# Altium PCB Mako DSP R2.0.PcbDoc (part 1 of 2)
Units mil, origin at the board's own origin, x right, y up, seen from the top; angles counter-clockwise.
Board outline 4440 x 2100 mil, 4 copper layers (Top Layer, GND, Power, Bottom Layer); 224 components, 235 nets, 988 pads, 314 vias.
Unrouted connection lines stored in the file: 159.
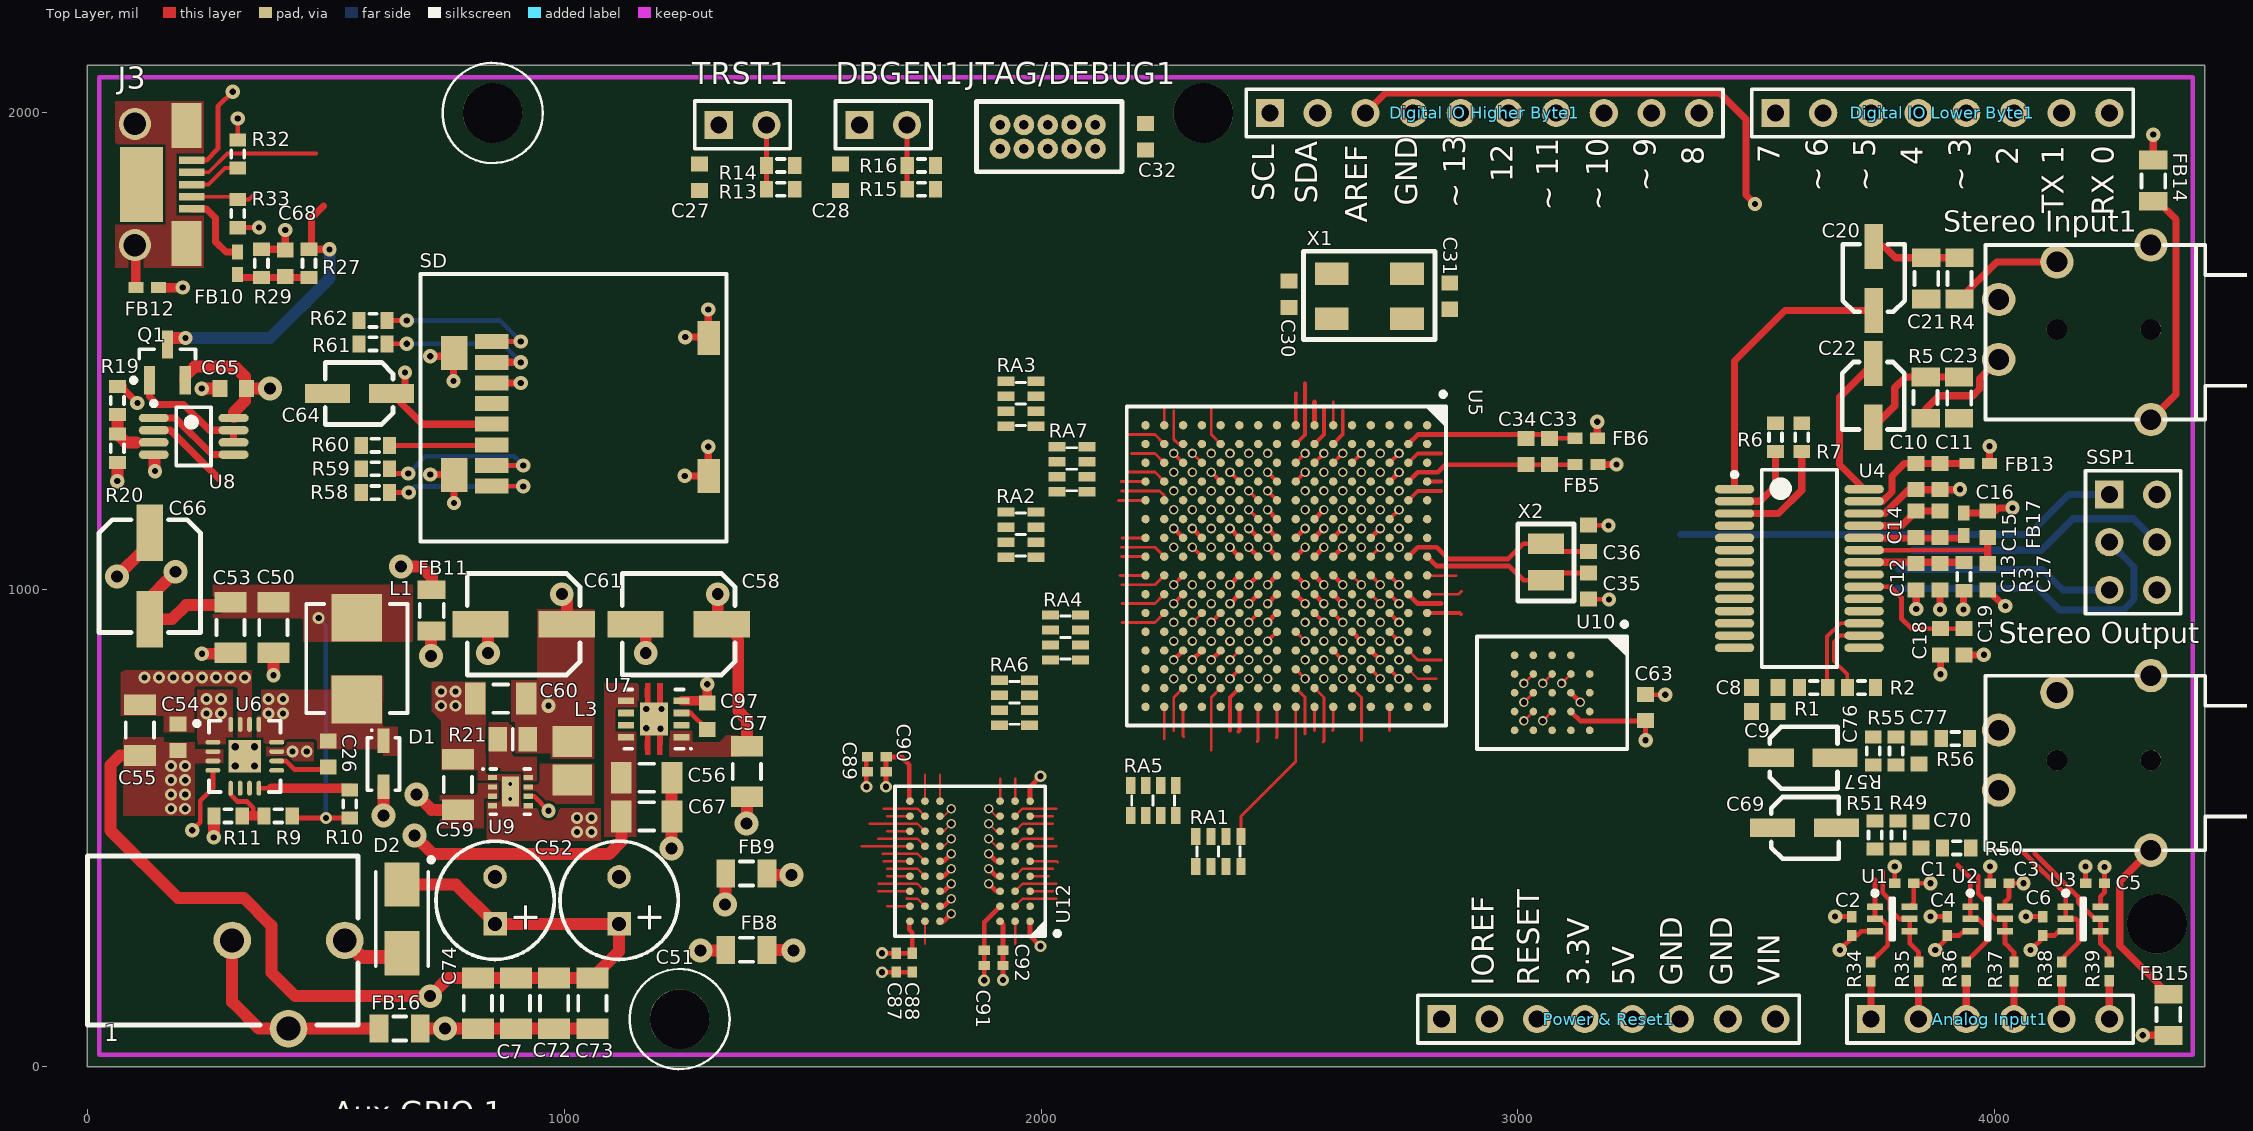
[diagram p0: Top Layer view]
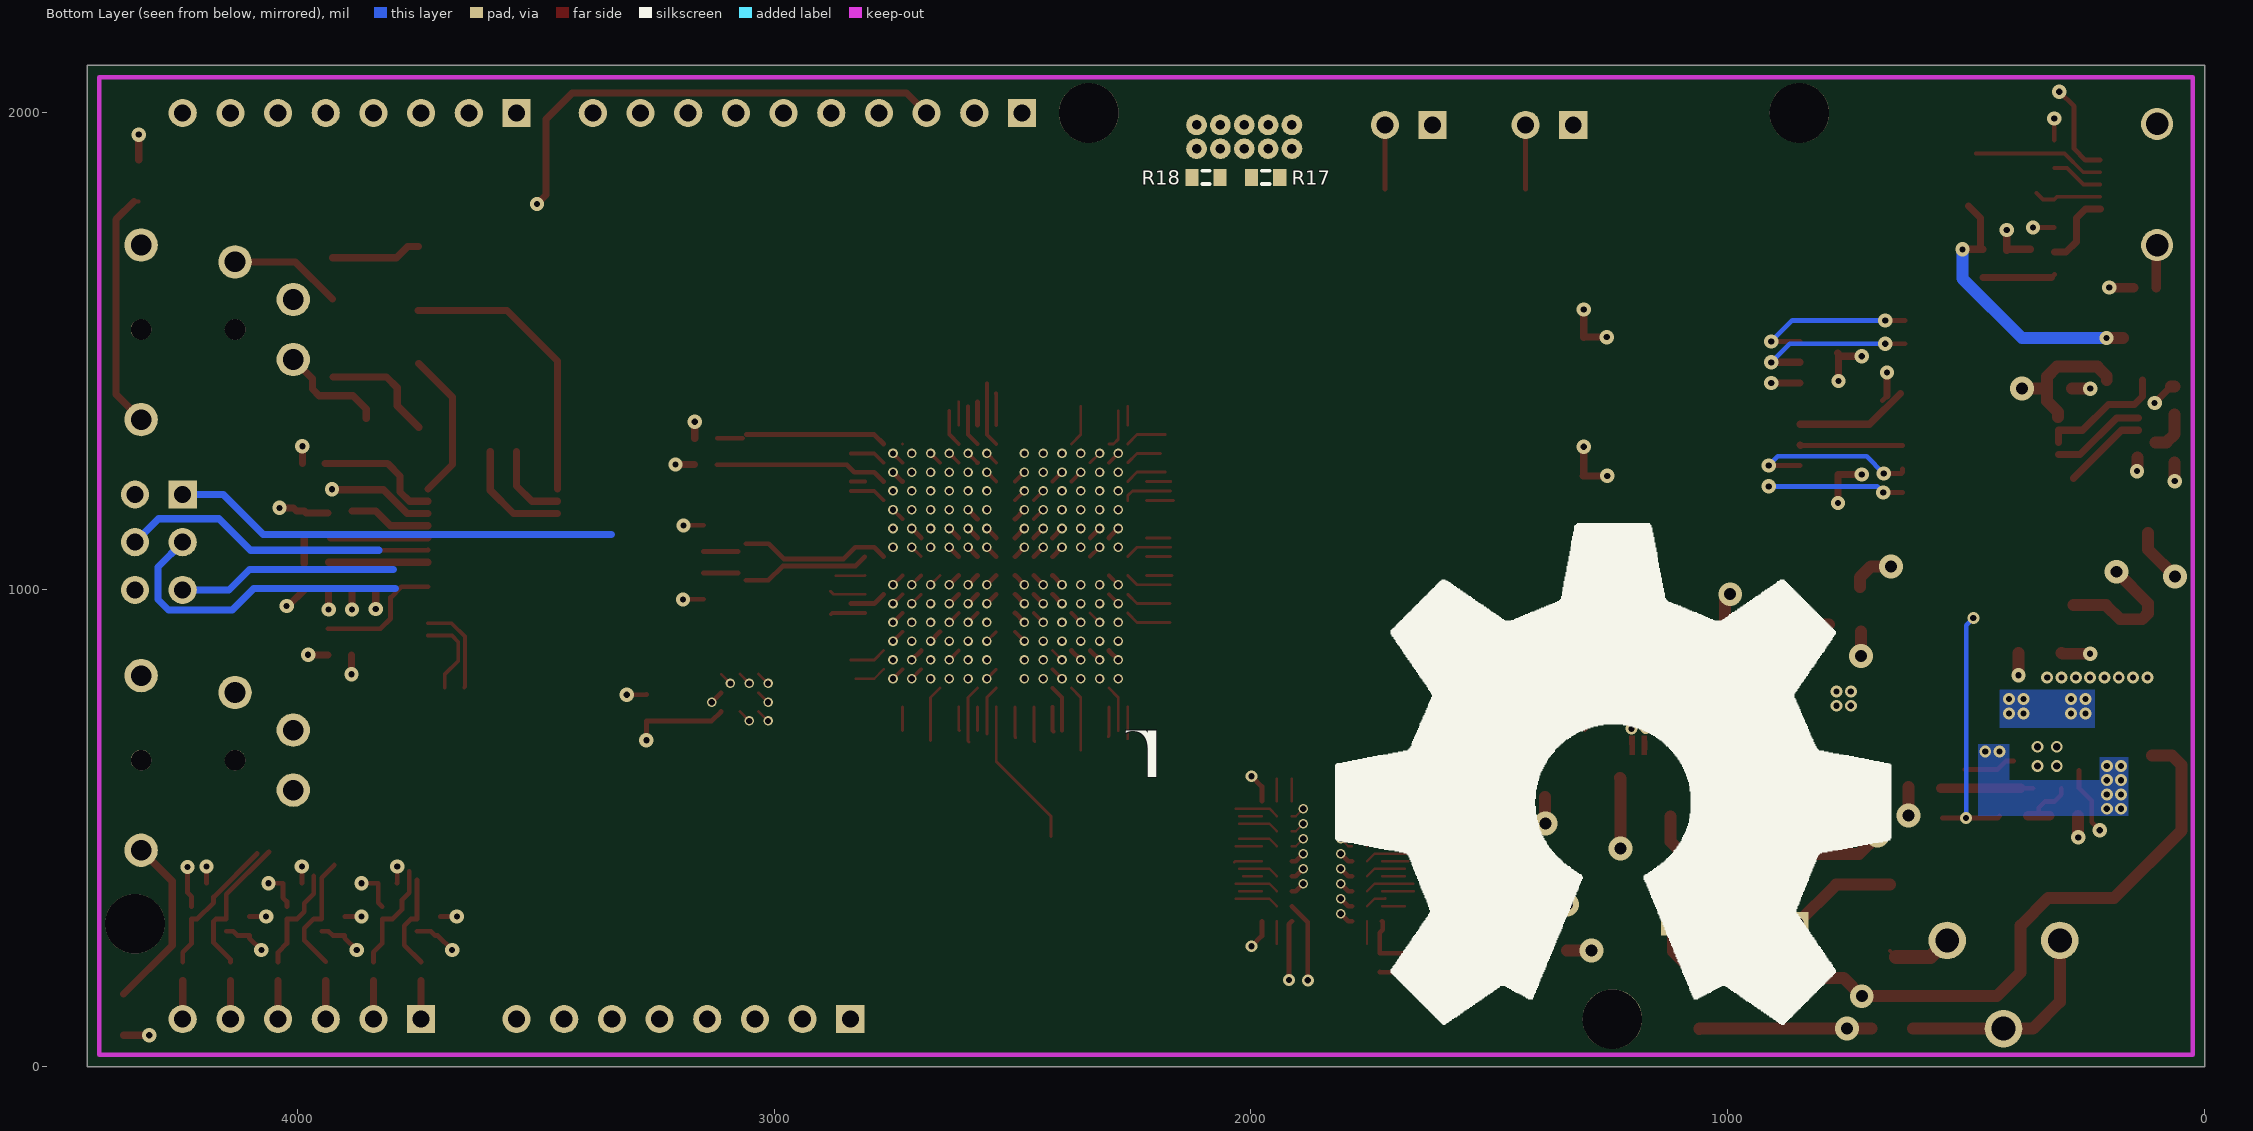
[diagram p1: Bottom Layer view, seen from below]
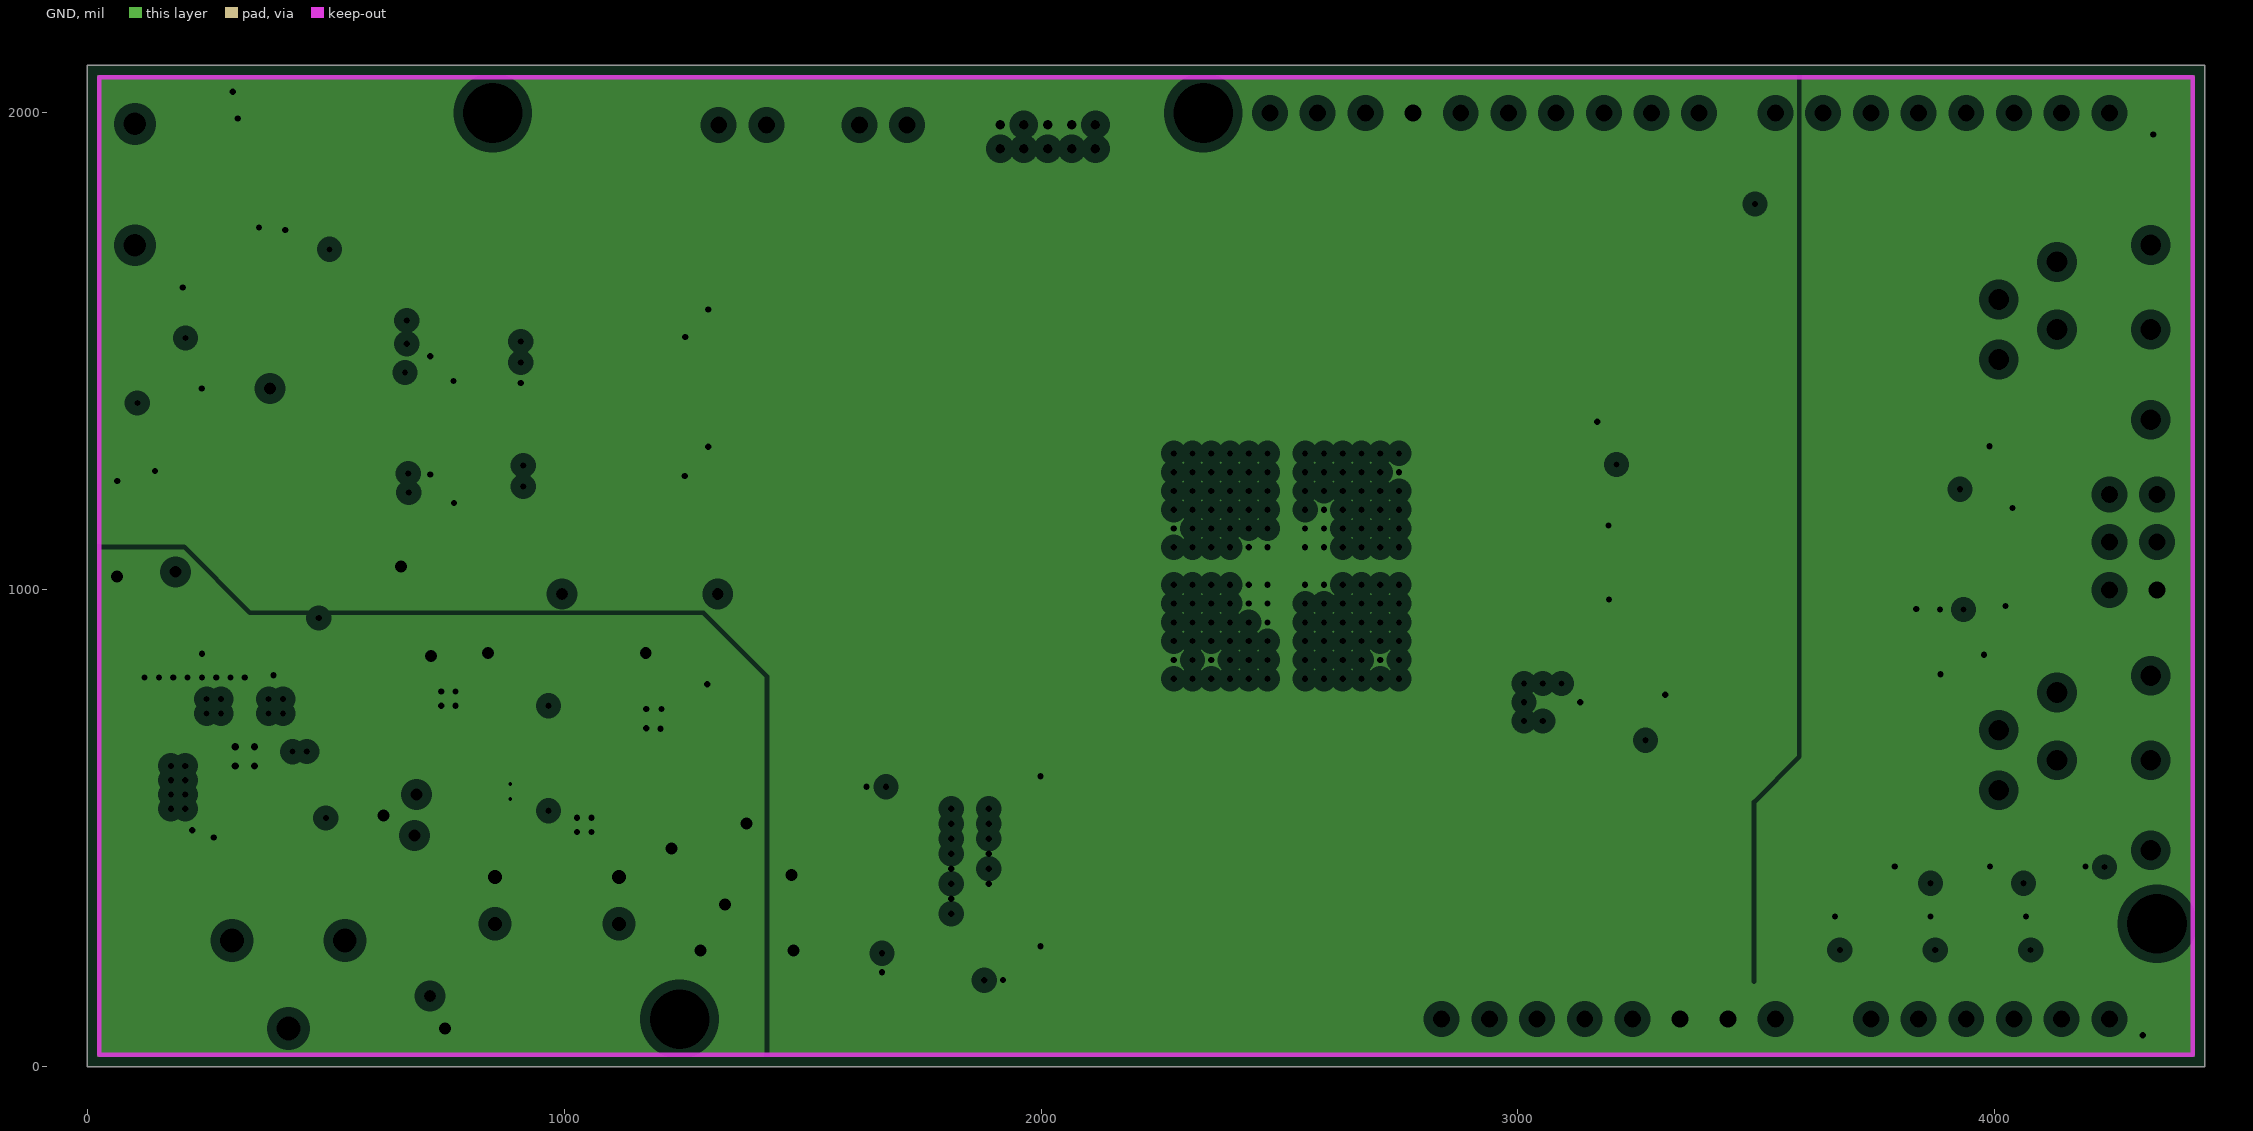
[diagram p2: GND, clearances drawn from the general rule]
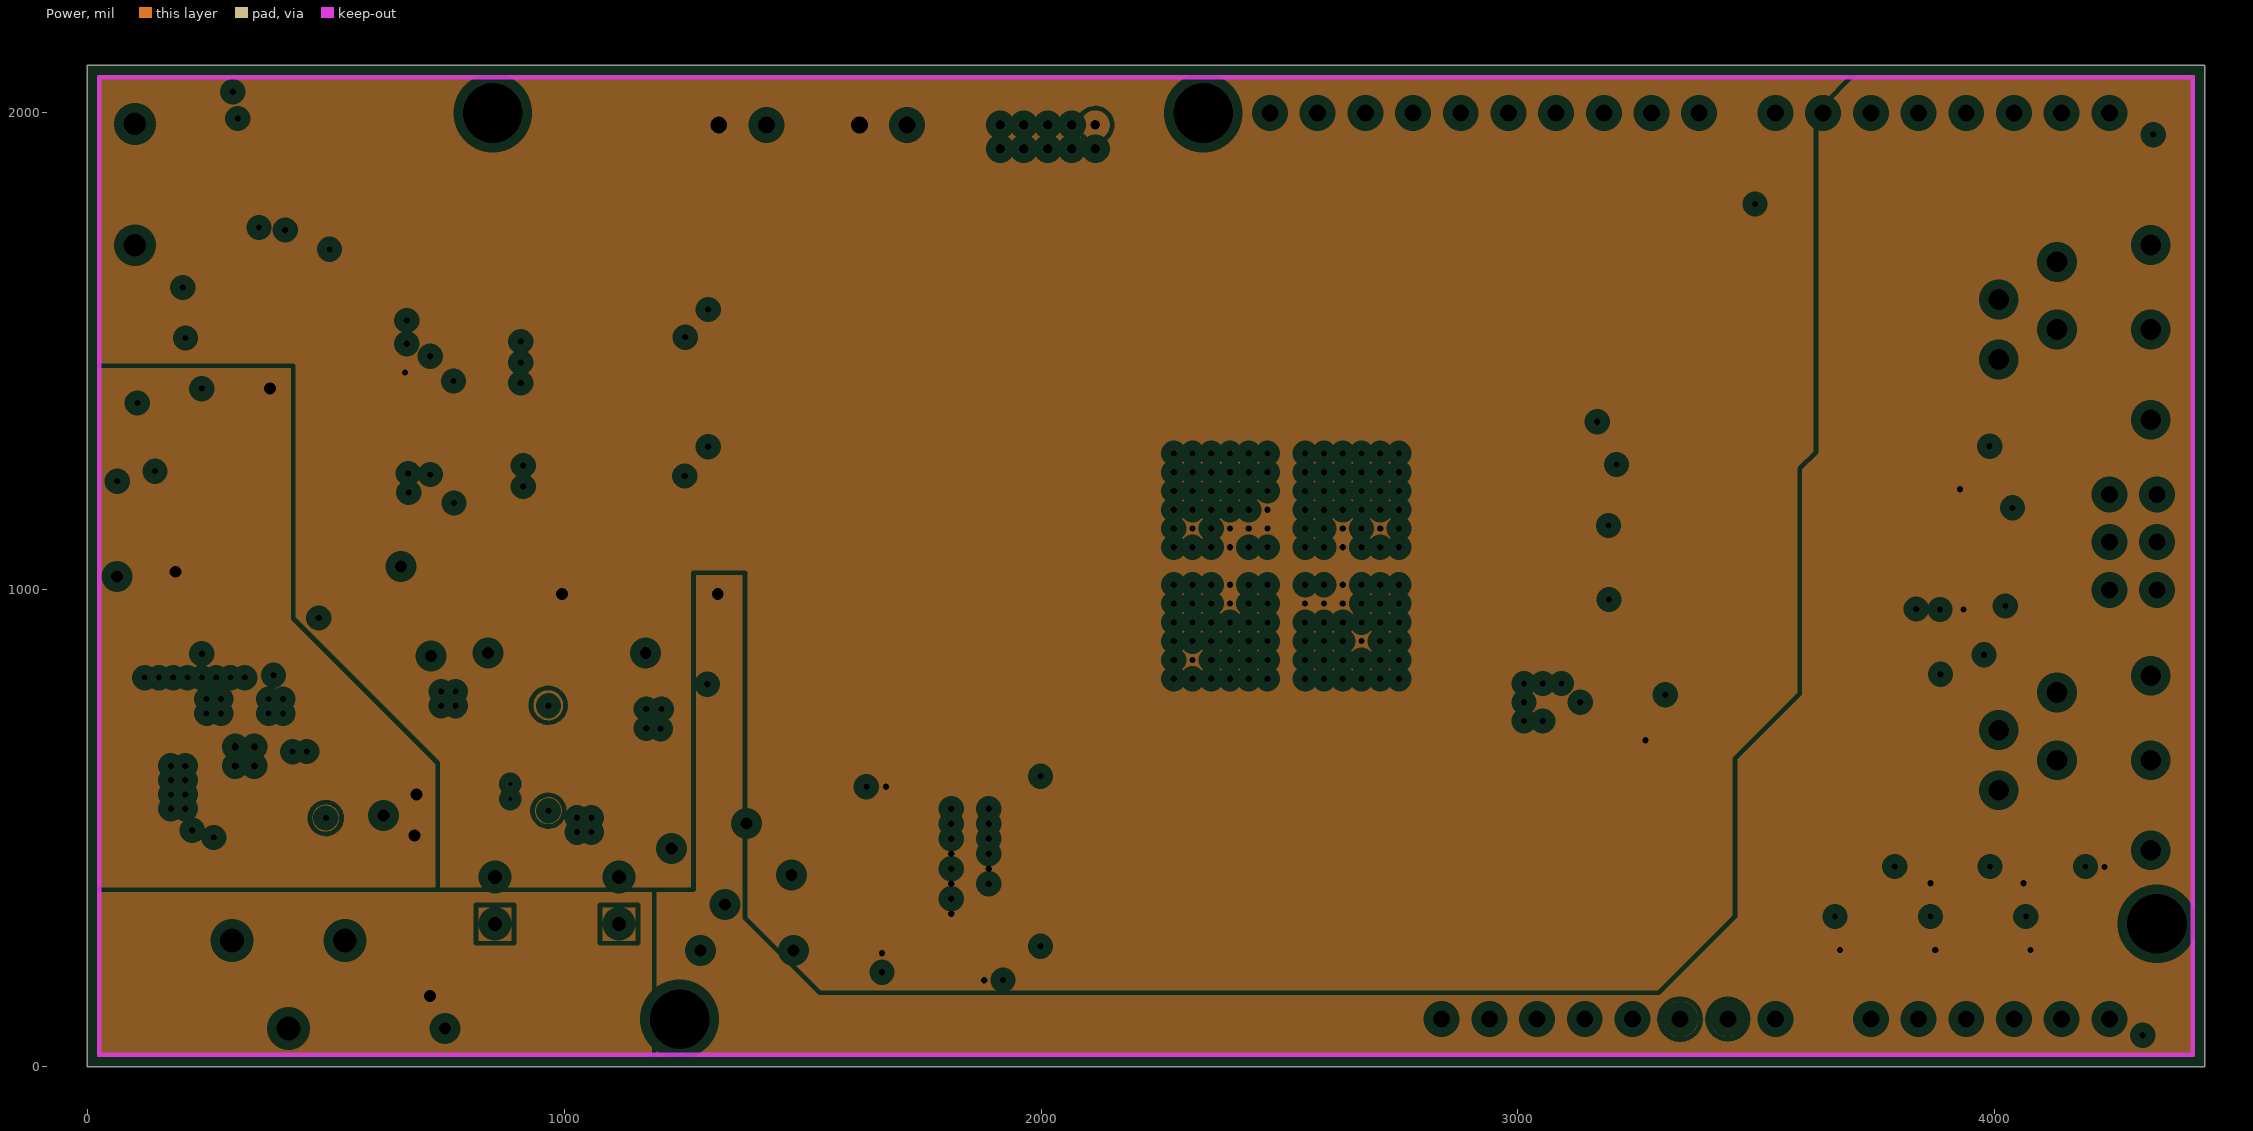
[diagram p3: Power, clearances drawn from the general rule]

## Layer stack, top to bottom
Top Layer: signal copper 1.4
Dielectric: core 12.6, FR-4, Dk 4.8
GND: plane copper 1.4, net GND
Dielectric: prepreg 12.6, FR-4, Dk 4.8
Power: plane copper 1.4, net (Multiple Nets)
Dielectric: core 12.6, FR-4, Dk 4.8
Bottom Layer: signal copper 1.4

## Board outline
0,0 4440,0 4440,2100 0,2100

## Design rules (kind name [scope] priority, off if disabled: settings)
Clearance [All] p1: gap=5
ComponentClearance [All] p1: gap=0 collisioncheckmode=3 verticalgap=10 showdistances=FALSE
DiffPairsRouting [All] p1: maxlimit=10 minlimit=10 mostfreqgap=10 maxuncoupledlength=500
FanoutControl Fanout_BGA [IsBGA] p1: bgadir=Out bgaviamode=Closest fanoutstyle=BGA fanoutdirection=Alternating viagrid=1 // Fanout_BGA (Default Rule)
FanoutControl Fanout_SOIC [(InComponent('U8') AND InComponent('U7'))] p3: bgadir=Out bgaviamode=Centered fanoutstyle=Staggered fanoutdirection=Alternating viagrid=1 // Fanout_SOIC (Default Rule)
FanoutControl Fanout_Small [All] p4: bgadir=Out bgaviamode=Centered fanoutstyle=Auto fanoutdirection=Alternating viagrid=1 // Fanout_Small (Default Rule)
HoleSize [All] p1: absolutevalues=TRUE maxlimit=120 minlimit=1 maxpercent=80.000 minpercent=20.000
MatchedLengths "SDRAM Signals" [InNetClass('U12-signals')] p1: tolerance=1 checknetsindiffpair=TRUE checkdiffpairvsdiffpair=TRUE checkothers=TRUE
MatchedLengths "SPIFI Flash Module" [(InNet('SPIFI_CS')AND InNet('SPIFI_SCK')AND InNet('SPIFI_MOSI')AND InNet('SPIFI_MISO')AND InNet('SPIFI_SIO2')AND InNet('SPIFI_SIO3'))] p2: tolerance=1 checknetsindiffpair=TRUE checkdiffpairvsdiffpair=TRUE checkothers=TRUE // 104MHZ Maximum signal speed
MinimumSolderMaskSliver [All] p1 off: minsoldermaskwidth=10
PlaneClearance [All] p1: clearance=20
PlaneConnect [All] p1: planeconnectstyle=Direct reliefexpansion=20 reliefentries=4 reliefconductorwidth=10 reliefairgap=10
PolygonConnect [All] p1: connectstyle=Direct reliefconductorwidth=45 reliefentries=4 polygonreliefangle="90 Angle" airgapwidth=10
RoutingVias [All] p1: holewidth=13 width=20 viastyle="Through Hole" minholewidth=13 minwidth=20 maxholewidth=28 maxwidth=50
SilkToSilkClearance [All] p1 off: silktosilkclearance=10
SilkToSolderMaskClearance SilkscreenOverComponentPads [IsPad] p1 off: minsilkscreentomaskgap=10 clearancetoexposedcopper=TRUE
SolderMaskExpansion [All] p1: expansion=4
Width "Power & Ground" [(InNet('DVDD') OR InNet('AVDD')OR InNet('+5V'))] p1: maxlimit=25 minlimit=10 preferedwidth=10 minimp=50.000000 maximp=50.000000 favimp=50.000000
Width "All Others" [All] p2: maxlimit=35 minlimit=5 preferedwidth=6 minimp=50.000000 maximp=50.000000 favimp=50.000000
17 further rules are at their usual default settings.

## Classes and differential pairs
component class "Mako DSP Power R2.0": 1 12VDC/VCCIN C7 C26 C50 C51 C52 C53 C54 C55 C56 C57 C58 C59 C60 C61 C65 C66 C67 C72 C73 C74 C97 D1 D2 D? FB8 FB9 FB11 FB16 L1 L3 Q1 R9 R10 R11 R19 R20 R21 U6 U7 U8 U9
component class "Mako DSP Arduio IO R2.0": "Analog Input1" "Analog Input?" "Aux GPIO 0" "Aux GPIO 1" C1 C2 C3 C4 C5 C6 "Digital IO Higher Byte1" "Digital IO Higher Byte?" "Digital IO Lower Byte1" "Digital IO Lower Byte?" "Power & Reset1" "Power & Reset?" R34 R35 R36 R37 R38 R39 SSP? U1 U2 U3
component class "Mako DSP Audio Codec R2.0": C8 C9 C10 C11 C12 C13 C14 C15 C16 C17 C18 C19 C20 C21 C22 C23 C69 C70 C75 C76 C77 C78 C79 FB13 FB14 FB15 FB17 R1 R2 R3 R4 R5 R6 R7 R31 R46 R48 R49 R50 R51 R52 R53 R54 R55 R56 R57 "Stereo Input1" "Stereo Input?" "Stereo Output" "Stereo Output1" "Stereo Output?" U4 U11
component class "Mako DSP Main R2.0": C24 C25 C27 C28 C29 C30 C31 C32 C33 C34 C35 C36 C37 C38 C39 C40 C41 C42 C43 C44 C45 C46 C47 C48 C49 C62 C80 C81 C82 C83 DBGEN1 FB1 FB2 FB3 FB4 FB5 FB6 "ISP PGM" JTAG/DEBUG1 R8 R12 R13 R14 R15 R16 R17 R18 R23 R24 R25 R26 R28 R30 RESET RESET1 RTCALARM1 SSP1 STATUS TRST1 U5 "USER STATUS" WAKEUP0 WAKEUP1 WAKEUP2 WAKEUP3 X1 X2
component class "Mako DSP USB R2.1": C68 FB10 FB12 J3 R27 R29 R32 R33
component class "Mako DSP Memory R2.0": C71 C84 C85 C86 C87 C88 C89 C90 C91 C92 C93 C94 C95 C96 RA1 RA2 RA3 RA4 RA5 RA6 RA7 U12
component class "Mako DSP QuadFlash and Boot R2.1": C63 R22 R40 R41 R42 R43 R44 R45 R47 U10
component class "Mako DSP SD Card and MIDI R2.1": C64 R58 R59 R60 R61 R62 SD
differential pair USB0: +USB0_P -USB0_N

## Components (designator, comment, footprint, x,y, rotation, side; value= is the part's Value field where it differs from the comment)
1 "Center-positive 2.1 mm power jack" PJ-102AH 540,265 r90 top
"Analog Input1" "Arduino Leonardo Analog" "Arduino Leonardo Analog" 3740,100 r0 top locked
"Aux GPIO 0" "Header 5X2" HDR2X5 558,-661 r0 top
"Aux GPIO 1" "Header 5X2" HDR2X5 566,-294 r0 top
C1 "Cap Semi" 0402 3810,385 r0 top
C2 "Cap Semi" 0402 3700,295 r270 top
C3 "Cap Semi" 0402 4010,385 r0 top
C4 "Cap Semi" 0402 3900,295 r270 top
C5 "Cap Semi" 0402 4210,385 r0 top
C6 "Cap Semi" 0402 4100,295 r270 top
C7 "Cap Semi" C1206 899,133 r90 top
C8 "Cap Semi" 1608[0603] 3517.56,795.31 r180 top
C9 "Cap Semi" 1608[0603] 3517.56,745.31 r180 top
C10 "Cap Semi" 1608[0603] 3835,1237.56 r270 top
C11 "Cap Semi" 1608[0603] 3885,1237.56 r270 top
C12 "Cap Semi" 1608[0603] 3835,1027.56 r90 top
C13 "Cap Semi" 1608[0603] 3885,1027.56 r90 top
C14 "Cap Semi" 1608[0603] 3835,1137.56 r90 top
C15 "Cap Semi" 1608[0603] 3885,1137.56 r90 top
C16 "Cap Semi" 1608[0603] 3985,1137.56 r270 top
C17 "Cap Semi" 1608[0603] 3985,1027.56 r90 top
C18 "Cap Semi" 1608[0603] 3886,891 r90 top
C19 "Cap Semi" 1608[0603] 3935,891 r90 top
C20 "Cap Semi" "Panasonic VS B"#1 3746,1653 r270 top
C21 "Cap Semi" "SM 0805 - gap trimmed" 3856,1653 r90 top
C22 "Cap Semi" "Panasonic VS B"#1 3745,1408 r90 top
C23 "Cap Semi" "SM 0805 - gap trimmed" 3925,1403 r90 top
C24 "Cap Semi" 0402 2492,3739 r270 top
C25 "Cap Semi" 0402 2397,3739 r270 top
C26 "Cap Semi" 1608[0603] 505.25,656 r270 top
C27 "Cap Semi" CAPC1608L 1284,1865 r90 top
C28 "Cap Semi" CAPC1608L 1579,1865 r90 top
C29 "Cap Semi" CAPC1608L 3491,2700 r180 top
C30 "Cap Semi" 1608[0603] 2520,1620 r90 top
C31 "Cap Semi" 1608[0603] 2857,1616 r90 top
C32 "Cap Semi" CAPC1608L 2219,1950 r270 top
C33 "Cap Semi" 1608[0603] 3065.7,1290 r270 top
C34 "Cap Semi" 1608[0603] 3016.7,1290 r270 top
C35 "Cap Semi" 1608[0603] 3147.7,1008 r90 top
C36 "Cap Semi" 1608[0603] 3147.7,1108 r270 top
C37 "0402" 0402 3446,3015 r180 top
C38 "0402" 0402 2378,2691 r90 top
C39 "0402" 0402 2955,2685 r90 top
C40 "0402" 0402 2600,2695 r90 top
C41 "0402" 0402 2380,2885 r90 top
C42 "0402" 0402 2334,2226 r0 top
C43 "0402" 0402 2533,2244 r0 top
C44 "0402" 0402 2199,2426 r0 top
C45 "0402" 0402 3221,3825 r180 top
C46 "0402" 0402 2365,2442 r0 top
C47 "0402" 0402 3426,3585 r180 top
C48 "0402" 0402 3451,3390 r180 top
C49 "0402" 0402 3451,3335 r180 top
C50 "1206" C1206 390.25,921 r90 top
C51 "Cap Pol1" CAPPR2.5-6.3x5 1115,349 r90 top
C52 "Cap Pol1" CAPPR2.5-6.3x5 855,349 r90 top
C53 "Cap Semi" C1206 300.25,921 r270 top
C54 "0603" 1608[0603] 190.25,691 r270 top
C55 "1206" C1206 110.25,706 r270 top
C56 "1206 Tantulum" C1206 1173,606 r0 top
C57 "1206 Tantulum" C1206 1383,619 r270 top
C58 "VS C" "Panasonic VS C" 1240,928 r0 top
C59 "Cap Semi" C1206 777,592 r270 top
C60 "Cap Semi" C1206 867,772 r0 top
C61 "VS C" "Panasonic VS C" 915,928 r0 top
C62 "0603" 1608[0603] 4996,1414 r90 top
C63 "0603" 1608[0603] 3267.62,753.21 r270 top
C64 "VS B" "Panasonic VS B"#2 501,1347 r0 top
C65 "Cap Semi" 1608[0603] 306,1422 r180 top
C66 "VS C" "Panasonic VS C" 131,1029 r90 top
C67 "1206 Tantulum" C1206 1173,525 r180 top
C68 "Cap Semi" 1608[0603] 415,1684.74 r270 top
C69 "Cap Semi" "Panasonic VS B"#1 3601,501 r180 top
C70 "0603" 1608[0603] 3845,486 r270 top
C71 "0402" 0402 1941,-146 r270 top
C72 "Cap Semi" C1206 979,133 r90 top
C73 "Cap Semi" C1206 1059,133 r90 top
C74 "Cap Semi" C1206 819,133 r90 top
C75 "0603" 1608[0603] 5127.9,374.47 r90 bottom
C76 "Cap Semi" "Panasonic VS B"#1 3598,648 r180 top
C77 "0603" 1608[0603] 3841,662 r90 top
C78 "0603" 1608[0603] 4890.9,374.47 r90 bottom
C79 "0603" 1608[0603] 5064,1003 r0 top
C80 "0402" 0402 2890,3332 r90 top
C81 "0402" 0402 3026,3274 r90 top
C82 "0402" 0402 3154,3157 r90 top
C83 "0402" 0402 2756,3041 r90 top
C84 "0402" 0402 1906,-146 r270 top
C85 "0402" 0402 1744,-178 r270 top
C86 "0402" 0402 1710,-178 r270 top
C87 "0402" 0402 1696.63,218.25 r90 top
C88 "0402" 0402 1729.63,218.25 r90 top
C89 "0402" 0402 1655.63,618.25 r0 top
C90 "0402" 0402 1655.63,650.25 r0 top
C91 "0402" 0402 1900.63,212.25 r180 top
C92 "0402" 0402 1900.63,244.25 r180 top
C93 "0402" 0402 2091,-158 r270 top
C94 "0402" 0402 2052,-158 r270 top
C95 "0402" 0402 1593.65,-121.88 r270 top
C96 "0402" 0402 1553.65,-123.88 r270 top
C97 "0603" 1608[0603] 1300,735 r270 top
D1 "PMEG1030EH_EJ" PMEG1030EH_EJ 621,635 r90 top
D2 "PMEG4050EP" PMEG4050EP 660,310 r270 top
DBGEN1 "Header 2" HDR1X2 1619,1975 r0 top
"Digital IO Higher Byte1" "Arduino Leonardo High Byte" "Arduino Leonardo High Byte" 2480,2000 r0 top locked
"Digital IO Lower Byte1" "Arduino Leonardo Low Byte" "Arduino Leonardo Low Byte" 3540,2000 r0 top locked
FB1 "BLM15HG601SN1D" BLM18PG121SN1D 2352,3729 r270 top
FB2 "BLM15HG601SN1D" BLM18PG121SN1D 2447,3729 r270 top
FB3 "BLM15HG601SN1D" BLM18PG121SN1D 2242,3729 r90 top
FB4 "BLM15HG601SN1D" BLM18PG121SN1D 2297,3729 r90 top
FB5 "BLM15HG601SN1D" BLM18PG121SN1D 3143.7,1263 r180 top
FB6 "BLM15HG601SN1D" BLM18PG121SN1D 3142.7,1318 r180 top
FB8 "MI0805L301R-10" "SM 0805 - gap trimmed" 1382,245 r180 top
FB9 "MI0805L301R-10" "SM 0805 - gap trimmed" 1382,405 r180 top
FB10 "BLM15HG601SN1D" BLM18PG121SN1D 315,1684.74 r90 top
FB11 "MI0805L301R-10" "SM 0805 - gap trimmed" 722,957 r90 top
FB12 "BLM15HG601SN1D" BLM18PG121SN1D 125.58,1634.02 r0 top
FB13 "BLM15HG601SN1D" BLM18PG121SN1D 3965.16,1265.16 r0 top
FB14 "Ferrite" "SM 0805 - gap trimmed" 4332,1858 r90 top
FB15 "Ferrite" "SM 0805 - gap trimmed" 4364,109 r270 top
FB16 "MI0805L301R-10" "SM 0805 - gap trimmed" 655,80 r180 top
FB17 "BLM15HG601SN1D" BLM18PG121SN1D 3935,1137.56 r90 top
J3 "DX4R005J91R5100" "Micro USB Circular Holes Only" 60.57,1849.02 r270 top
JTAG/DEBUG1 "S9015E-05-ND" S9015E-05-ND 1914,1975 r0 top
L1 "Inductor" CIP0530LR3R3 565.25,856 r90 top
L3 "Inductor" VLS252012T-2R2M1R3 1017,642 r90 top
"Power & Reset1" "Arduino Leonardo Power" "Arduino Leonardo Power" 2840,100 r0 top locked
Q1 "FDN340P" SOT23-3N 168,1477 r90 top
R1 "Res3" J1-0603 3620.16,795.16 r180 top
R2 "Res3" J1-0603 3720.16,795.16 r0 top
R3 "Res3" J1-0603 3935,1027.56 r270 top
R4 "Res3" "SM 0805 - gap trimmed" 3926,1653 r270 top
R5 "Res3" "SM 0805 - gap trimmed" 3855,1403 r270 top
R6 "Res3" J1-0603 3540,1320 r270 top
R7 "Res3" J1-0603 3595,1320 r270 top
R8 "Res3" J1-0603 2187,3729 r270 top
R9 "Res3" J1-0603 400.25,526 r0 top
R10 "Res3" J1-0603 550.25,551 r90 top
R11 "Res3" J1-0603 295.25,526 r0 top
R12 "Res3" J1-0603 3491,2650 r0 top
R13 "Res3" J1-0603 1454,1840 r180 top
R14 "Res3" J1-0603 1454,1890 r180 top
R15 "Res3" J1-0603 1749,1840 r180 top
R16 "Res3" J1-0603 1749,1890 r180 top
R17 "Res3" J1-0603 1969,1865 r180 bottom
R18 "Res3" J1-0603 2094,1865 r0 bottom
R19 "Res3" J1-0603 63,1397 r90 top
R20 "Res3" J1-0603 63,1297 r90 top
R21 "Res3" RESC2012L 892,687 r0 top
R22 "0603" J1-0603 9566,1666 r90 top
R23 "Res3" J1-0603 1380,3790 r90 top
R24 "Res3" J1-0603 1310,3790 r270 top
R25 "Res3" J1-0603 1450,3870 r90 top
R26 "Res3" J1-0603 6043,1024 r0 top
R27 "Res3" J1-0603 465,1684.74 r90 top
R28 "Res3" J1-0603 5948,1039 r270 top
R29 "Res3" J1-0603 365,1684.74 r90 top
R30 "Res3" J1-0603 6143,1069 r90 top
R31 "0603" J1-0603 5175.9,473.47 r90 bottom
R32 "Res3" J1-0603 315.58,1914.02 r90 top
R33 "Res3" J1-0603 315.58,1789.02 r270 top
R34 "Res3" "0402 - duplicate" 3740,200 r90 top
R35 "Res3" "0402 - duplicate" 3840,200 r90 top
R36 "Res3" "0402 - duplicate" 3940,200 r90 top
R37 "Res3" "0402 - duplicate" 4040,200 r90 top
R38 "Res3" "0402 - duplicate" 4140,200 r90 top
R39 "Res3" "0402 - duplicate" 4240,200 r90 top
R40 "0603" J1-0603 9336,1666 r90 top
R41 "0603" J1-0603 9125,1666 r90 top
R42 "0603" J1-0603 8895,1666 r90 top
R43 "0603" J1-0603 7975,1666 r90 top
R44 "0603" J1-0603 8205,1666 r90 top
R45 "0603" J1-0603 8435,1666 r90 top
R46 "0603" J1-0603 5127.9,473.47 r90 bottom
R47 "0603" J1-0603 8665,1666 r90 top
R48 "0603" J1-0603 5127.9,572.47 r90 bottom
R49 "0603" J1-0603 3797,486 r90 top
R50 "0603" J1-0603 3920,459 r180 top
R51 "0603" J1-0603 3749,486 r90 top
R52 "0603" J1-0603 4842.9,472.47 r90 bottom
R53 "0603" J1-0603 4890.9,473.47 r90 bottom
R54 "0603" J1-0603 4890.9,572.47 r90 bottom
R55 "0603" J1-0603 3793,662 r270 top
R56 "0603" J1-0603 3917,688 r180 top
R57 "0603" J1-0603 3745,662 r270 top
R58 "0603" J1-0603 604,1204 r180 top
R59 "0603" J1-0603 604,1254 r180 top
R60 "0603" J1-0603 604,1303 r180 top
R61 "0603" J1-0603 599,1516 r180 top
R62 "0603" J1-0603 599,1565 r180 top
RA1 "RESISTOR ARRAY" 742C083 2371.95,451.28 r180 top
RA2 "RESISTOR ARRAY" 742C083 1957.59,1115.96 r270 top
RA3 "RESISTOR ARRAY" 742C083 1957.59,1389.96 r90 top
RA4 "RESISTOR ARRAY" 742C083 2051.15,900.11 r270 top
RA5 "RESISTOR ARRAY" 742C083 2234.95,558.28 r180 top
RA6 "RESISTOR ARRAY" 742C083 1944.15,763.11 r270 top
RA7 "RESISTOR ARRAY" 742C083 2064.59,1252.96 r270 top
RESET1 "Tactile Switch" TL3301 4098,5059 r90 top
RTCALARM1 "Socket" PIN1 1852,2590 r90 top
SD "JAE SJ107021" "JAE SJ107021" 1303,1369 r0 top
SSP1 "Header 3X2" HDR2X3 4240,1200 r270 top locked
STATUS "APTF1616SEEZGQBDC" "RGB LED APTF1616SEEZGQBDC" 1380,3905 r180 top
"Stereo Input1" "CUI 43515TS" "CUI SJ-43515TS" 4327,1546 r180 top locked
"Stereo Output" "CUI 43515TS" "CUI SJ-43515TS" 4327,643 r180 top locked (schematic designator "Stereo Output1")
TRST1 "Header 2" HDR1X2 1324,1975 r0 top
U1 "BAV70S SOT-363" BAV70S_SOT363 3785,310 r0 top
U2 "BAV70S SOT-363" BAV70S_SOT363 3985,310 r0 top
U3 "BAV70S SOT-363" BAV70S_SOT363 4185,310 r0 top
U4 "WM8778" WM8778 3590,1045 r0 top
U5 "LPC4330FET256" SOT740-2 2514.28,1050 r270 top locked
U6 "MIC24085" MIC24085-AYML 330.25,651 r0 top
U7 "TPS73733QDRBRQ1" TI-DRB8-1750X1500TP_V 1188,729 r180 top
U8 "Ti LM358 SOP" LM358 223,1322 r0 top
U9 "TPS62162SOP" DSG8-1600X900TP 887,577 r0 top
U10 "S25FL064P0XNFI001" S25FL064P0XNFI001 3071.62,784.21 r270 top
U11 "OPA2320AIDRGR" TI-DRG8-2000X1200TP_V 5008.9,434.47 r180 bottom
U12 "AS4C8M16S" AS4C8M16S 1851,431 r180 top
"USER STATUS" "APTF1616SEEZGQBDC" "RGB LED APTF1616SEEZGQBDC" 6073,1109 r180 top
WAKEUP0 "Socket" PIN1 1474,2579 r270 top
WAKEUP1 "Socket" PIN1 6015,609 r90 top
WAKEUP2 "Socket" PIN1 6762,598 r90 top
WAKEUP3 "Socket" PIN1 6464,565 r90 top
X1 "ABM3B-12.000MHZ-B2-T" ABM3B-12.000MHZ-B2-T 2767,1663 r180 top
X2 "ABS07-32.768KHZ-T" ABS07-32.768KHZ-T 3058.7,1020 r90 top

## Footprints (in the part's own frame and the unit in brackets; to place one, negate y for a bottom-side part, rotate by r counter-clockwise, add the part's x,y. Pads: shape width x height; smd on the part's side, far side on the other; paste and mask are expansions set on the pad)
0402 [mm] "Chip Capacitor, Body 1.0x0.5mm, IPC High Density"
  rect 0.6x0.5 smd: 1(-0.5,0) 2(0.5,0)
  body extent -0.55,-0.3 0.55,0.3, height 1.3
"0402 - duplicate" [mm] "Chip Capacitor, Body 1.0x0.5mm, IPC High Density"
  rect 0.6x0.5 smd: 1(-0.5,0) 2(0.5,0)
  body extent -0.55,-0.3 0.55,0.3, height 1.3
742C083 [mm] "Resistor array"
  rect 0.5x0.9 smd mask+0.025: 1(-1.2,-0.8) 2(-0.4,-0.8) 3(0.4,-0.8) 4(1.2,-0.8) 5(1.2,0.8) 6(0.4,0.8) 7(-0.4,0.8) 8(-1.2,0.8)
  silkscreen extent -1.14,-0.25 1.14,0.25, body extent -1.27,-0.76 1.27,0.76, height 0.9
1608[0603] [mm] "Chip Capacitor, Body 1.6x0.8mm, IPC High Density"
  rect 0.8x0.9 smd: 1(-0.7,0) 2(0.7,0)
  body extent -0.87,-0.48 0.87,0.48, height 1.3
ABM3B-12.000MHZ-B2-T [mm] "ABM3B-12.000MHZ-B2-T 12MHZ Crystam Oscillator"
  rect 1.8x1.2 smd: 1(0,0) 2(4,0) 3(4,2.4) 4(0,2.4)
  silkscreen extent -1.5,-1.2 5.5,3.5
ABS07-32.768KHZ-T [mm] "ABS07-32.768KHZ-T Crystal Oscillator"
  rect 1.1x1.9 smd: 1(0,0) 2(1.95,0)
  silkscreen extent -1.1,-1.5 3,1.5
"Arduino Leonardo Analog" [mm] "Connector; Header; 6 Position"
  rect 1.5x1.5 hole 0.9: 1(0,0)
  round 1.5 hole 0.9: 2(2.54,0) 3(5.08,0) 4(7.62,0) 5(10.16,0) 6(12.7,0)
  silkscreen extent -1.27,-1.27 13.97,1.27
"Arduino Leonardo High Byte" [mm]
  rect 1.5x1.5 hole 0.9: 1(0,0)
  round 1.5 hole 0.9: 2(2.54,0) 3(5.08,0) 4(7.62,0) 5(10.16,0) 6(12.7,0) 7(15.24,0) 8(17.78,0) 9(20.32,0) 10(22.86,0)
  silkscreen extent -1.27,-1.27 24.13,1.27
"Arduino Leonardo Low Byte" [mm] "Connector; Header; 8 Position"
  rect 1.5x1.5 hole 0.9: 1(0,0)
  round 1.5 hole 0.9: 2(2.54,0) 3(5.08,0) 4(7.62,0) 5(10.16,0) 6(12.7,0) 7(15.24,0) 8(17.78,0)
  silkscreen extent -1.27,-1.27 19.05,1.27
"Arduino Leonardo Power" [mm] "Connector; Header; 8 Position"
  rect 1.5x1.5 hole 0.9: 1(0,0)
  round 1.5 hole 0.9: 2(2.54,0) 3(5.08,0) 4(7.62,0) 5(10.16,0) 6(12.7,0) 7(15.24,0) 8(17.78,0)
  silkscreen extent -1.27,-1.27 19.05,1.27
AS4C8M16S [mm] "BGA, 54-Leads, Body 8.00x8.00mmx1.20mm, Pitch 0.80mm"
  round 0.41 smd: A1(-3.2,3.2) A2(-2.4,3.2) A3(-1.6,3.2) A7(1.6,3.2) A8(2.4,3.2) A9(3.2,3.2) B1(-3.2,2.4) B2(-2.4,2.4) B3(-1.6,2.4) B7(1.6,2.4) B8(2.4,2.4) B9(3.2,2.4) C1(-3.2,1.6) C2(-2.4,1.6) C3(-1.6,1.6) C7(1.6,1.6) C8(2.4,1.6) C9(3.2,1.6) D1(-3.2,0.8) D2(-2.4,0.8) D3(-1.6,0.8) D7(1.6,0.8) D8(2.4,0.8) D9(3.2,0.8) E1(-3.2,0) E2(-2.4,0) E3(-1.6,0) E7(1.6,0) E8(2.4,0) E9(3.2,0) F1(-3.2,-0.8) F2(-2.4,-0.8) F3(-1.6,-0.8) F7(1.6,-0.8) F8(2.4,-0.8) F9(3.2,-0.8) G1(-3.2,-1.6) G2(-2.4,-1.6) G3(-1.6,-1.6) G7(1.6,-1.6) G8(2.4,-1.6) G9(3.2,-1.6) H1(-3.2,-2.4) H2(-2.4,-2.4) H3(-1.6,-2.4) H7(1.6,-2.4) H8(2.4,-2.4) H9(3.2,-2.4) J1(-3.2,-3.2) J2(-2.4,-3.2) J3(-1.6,-3.2) J7(1.6,-3.2) J8(2.4,-3.2) J9(3.2,-3.2)
  silkscreen extent -4.78,-4 4,4, body extent -4,-4 4,4, height 1.2
BAV70S_SOT363 [mm] "SOT23, 6-Leads, Body 2.2x2.2mm (max), Pitch 0.65mm, IPC Medium Density"
  rect 0.85x0.35 smd: 1(-0.925,0.65) 2(-0.925,0) 3(-0.925,-0.65) 4(0.925,-0.65) 5(0.925,0) 6(0.925,0.65)
  silkscreen extent -1.05,-1.1 0.1,1.5, body extent -0.67,-1.1 0.67,1.1, height 1.1
BLM18PG121SN1D [mm] "Chip Inductor, 2-Leads, Body 1.0x0.5mm, IPC Medium Density"
  rect 0.8x0.6 smd: 1(-0.6,0) 2(0.6,0)
  body extent -0.52,-0.28 0.53,0.27, height 0.6
C1206 [mm] "Chip Capacitor, Body 3.2x1.6mm, IPC High Density"
  rect 1.1x1.7 smd: 1(-1.35,0) 2(1.35,0)
  silkscreen extent -0.4,-0.75 0.4,0.75, body extent -1.7,-0.9 1.7,0.9, height 1.3
CAPC1608L [mm] "Chip Capacitor, Body 1.6x0.8mm, IPC High Density"
  rect 0.8x0.9 smd: 1(-0.7,0) 2(0.7,0)
  body extent -0.87,-0.48 0.87,0.48, height 0.85
CAPPR2.5-6.3x5 [mm] "Capacitor, Electrolytic, Radial; Body 6.3 x 5 mm (Dia.xH typ); Pin Spacing 2.5 mm (typ)"
  rect 1.25x1.25 hole 0.75: 1(-1.25,0)
  round 1.25 hole 0.75: 2(1.25,0)
  silkscreen extent -3.15,-3.15 3.15,3.15
CIP0530LR3R3 [mm] "Precision Wire Wound Inductor, 2-Leads, Body 5.58x5.30mm, IPC Medium Density"
  rect 2.55x2.7 smd: 1(-2.175,0) 2(2.175,0)
  silkscreen extent -2.9,-2.7 2.9,2.7, body extent -2.88,-2.7 2.88,2.7, height 2.29
"CUI SJ-43515TS" [mm]
  round 1.778 hole 1.1: 1(8.1,1.6) 3(8.1,-1.6) 4(5,-3.6) 5(0,4.8) 6(0,-4.5)
  round 1.1 hole 1.1: ""(0,0) ""(5,0)
  silkscreen extent -5.4,-4.5 8.8,4.8
DSG8-1600X900TP [mm] "SON, 8-Leads, Body 2x2mm, Pitch 0.5mm, Thermal Pad 1.6x0.9mm, TI Recommended"
  rect 0.5x0.28 smd paste-0.14 mask+0.07: 1(-0.95,0.75) 2(-0.95,0.25) 3(-0.95,-0.25) 4(-0.95,-0.75) 5(0.95,-0.75) 6(0.95,-0.25) 7(0.95,0.25) 8(0.95,0.75)
  rect 0.9x1.6 smd paste-0.45 mask+0.07: 9(0,0)
  silkscreen extent -1.5,-1.2 1.05,1.25, body extent -1.05,-1.05 1.05,1.05, height 0.8
HDR1X2 [mm] "Connector; Header; 2 Position"
  rect 1.5x1.5 hole 0.9: 1(0,0)
  round 1.5 hole 0.9: 2(2.54,0)
  silkscreen extent -1.27,-1.27 3.81,1.27
HDR2X3 [mm] "Connector; Header; 3x2 Position"
  rect 1.5x1.5 hole 0.9: 1(0,0)
  round 1.5 hole 0.9: 2(0,2.54) 3(2.54,0) 4(2.54,2.54) 5(5.08,0) 6(5.08,2.54)
  silkscreen extent -1.27,-1.27 6.35,3.81
HDR2X5 [mm] "Connector; Header; 5x2 Position"
  rect 1.5x1.5 hole 0.9: 1(0,0)
  round 1.5 hole 0.9: 2(0,2.54) 3(2.54,0) 4(2.54,2.54) 5(5.08,0) 6(5.08,2.54) 7(7.62,0) 8(7.62,2.54) 9(10.16,0) 10(10.16,2.54)
  silkscreen extent -1.27,-1.27 11.43,3.81
J1-0603 [mm] "Chip Resistor, Body 1.6x0.8mm, IPC High Density"
  rect 0.7x0.9 smd: 1(-0.75,0) 2(0.75,0)
  silkscreen extent -0.2,-0.35 0.2,0.35, body extent -0.85,-0.48 0.85,0.48, height 0.9
"JAE SJ107021" [mm] "MicroSD card socket"
  rect 1.8x0.8 smd: 1(-11.55,-3.85) 2(-11.55,-2.75) 3(-11.55,-1.65) 4(-11.55,-0.55) 5(-11.55,0.55) 6(-11.55,1.65) 7(-11.55,2.75) 8(-11.55,3.85)
  rect 1.2x1.8 smd: 9(0,-3.3) 10(0,4.05)
  rect 1.4x1.8 smd: 11(-13.55,-3.25) 12(-13.55,3.25)
  silkscreen extent -15.35,-6.8 0.95,7.45, body extent -15.25,-6.75 1,7.5, height 2
LM358 [mm] "TSOP, 8-Leads, Body 3.00x3.00mm, Pitch 0.65mm, IPC Medium Density"
  oval 1.6x0.45 smd: 1(-2.125,0.975) 2(-2.125,0.325) 3(-2.125,-0.325) 4(-2.125,-0.975) 5(2.125,-0.975) 6(2.125,-0.325) 7(2.125,0.325) 8(2.125,0.975)
  silkscreen extent -2.25,-1.55 0.93,1.87, body extent -1.55,-1.55 1.55,1.55, height 1.1
MIC24085-AYML [mm] "QFN, 16-Leads, Body 3.25x3.25mm, Pitch 0.50mm, Thermal Pad 1.73x1.73mm, IPC Medium Density"
  oval 0.8x0.25 smd: 1(-1.7,0.75) 2(-1.7,0.25) 3(-1.7,-0.25) 4(-1.7,-0.75) 9(1.7,-0.75) 10(1.7,-0.25) 11(1.7,0.25) 12(1.7,0.75)
  oval 0.25x0.8 smd: 5(-0.75,-1.7) 6(-0.25,-1.7) 7(0.25,-1.7) 8(0.75,-1.7) 13(0.75,1.7) 14(0.25,1.7) 15(-0.25,1.7) 16(-0.75,1.7)
  rect 1.73x1.73 smd: 17(0,0)
  silkscreen extent -2.67,-1.9 1.9,1.9, body extent -1.75,-1.75 1.75,1.75, height 0.85
"Micro USB Circular Holes Only" [mm]
  rect 0.4x1.35 smd: 1(1.275,4.025) 2(0.625,4.025) 3(-0.025,4.025) 4(-0.675,4.025) 5(-1.325,4.025)
  rect 2.4x1.6 smd: 6(3.125,3.75) 9(-3.175,3.75)
  round 1.7 hole 1.2: 7(3.2,1) 8(-3.25,1)
  rect 4x2.3 smd: GND(-0.025,1.35)
  body extent -4.1,-1.64 4.1,3.79, height 2.73
"Panasonic VS B"#1 [mm]
  rect 2.4x1 smd: 1(1.7,0) 2(-1.7,0)
  silkscreen extent -1.82,-1.65 1.78,1.65
"Panasonic VS B"#2 [mm]
  rect 2.4x1 smd: 1(3.478,1.651) 2(0.078,1.651)
  silkscreen extent -0.05,0 3.55,3.3
"Panasonic VS C" [mm]
  rect 3x1.4 smd: 1(2.3,0) 2(-2.3,0)
  silkscreen extent -3,-2.7 3,2.7
PIN1 [mm] "Connector; Plug"
  rect 1.5x1.5 hole 0.9: 1(0,0)
  silkscreen extent -1.4,-1.4 1.4,2.17
PJ-102AH [mm] "Center positive 2.1 mm power jack"
  round 2 hole 1.27: 1(0,0) 2(0,6) 3(-4.7,3)
  silkscreen extent -4.5,-0.7 4.5,13.7, body extent -5.8,-0.7 4.5,13.7, height 11
PMEG1030EH_EJ [mm] "Molded Diode, 2-Leads, Body 2.60x1.60mm, IPC Medium Density"
  rect 1.3x0.65 smd: 1(-1.225,0) 2(1.225,0)
  silkscreen extent -1.4,-0.85 1.85,0.85, body extent -1.35,-0.85 1.35,0.85, height 1.2
PMEG4050EP [mm] "PMEG4050EP NXP SMD Schottky Diode"
  rect 2.35x1.85 smd: 1(-1.825,0) 2(1.825,0)
  silkscreen extent -3.27,-1.4 2.5,1.68, body extent -2.5,-1.35 2.5,1.35, height 1.1
RESC2012L [mm] "Chip Resistor, Body 2.0x1.3mm, IPC High Density"
  rect 1x1.3 smd: 1(-0.8,0) 2(0.8,0)
  silkscreen extent 0,-0.55 0,0.55, body extent -1.07,-0.7 1.07,0.7, height 0.65
"RGB LED APTF1616SEEZGQBDC" [mm] "RGB LED"
  rect 0.8x0.5 smd: 1(1.8,0) 2(0,0) 3(0,1) 4(1.8,1)
  silkscreen extent -0.78,-0.3 -0.78,1.27
S25FL064P0XNFI001 [mm] "BGA, 25-Leads, Body 6.00x8.00mmx0.90mm, Pitch 1.00mm"
  round 0.41 smd: A2(-1,2) A3(0,2) A4(1,2) A5(2,2) B1(-2,1) B2(-1,1) B3(0,1) B4(1,1) B5(2,1) C1(-2,0) C2(-1,0) C3(0,0) C4(1,0) C5(2,0) D1(-2,-1) D2(-1,-1) D3(0,-1) D4(1,-1) D5(2,-1) E1(-2,-2) E2(-1,-2) E3(0,-2) E4(1,-2) E5(2,-2)
  silkscreen extent -3.77,-4 3,4, body extent -3,-4 3,4, height 0.9
S9015E-05-ND [mm] "10 Pin Cortex JTAG Debug Header"
  round 1.1 hole 0.508: 1(5.08,0) 2(5.08,-1.27) 3(3.81,0) 4(3.81,-1.27) 5(2.54,0) 6(2.54,-1.27) 7(1.27,0) 8(1.27,-1.27) 9(0,0) 10(0,-1.27)
  round 0.5 on Top Overlay: 1(7,0.8)
  silkscreen extent -1.25,-2.5 6.5,1.25
"SM 0805 - gap trimmed" [mm]
  rect 1x1.5 smd: 1(-1.1,0) 2(1.1,0)
  silkscreen extent -0.35,-0.65 0.34,0.63
SOT23-3N [mm] "SOT23, 3-Leads, Body 2.9x1.3mm, Pitch 0.95mm, Lead Span 2.5mm, IPC Medium Density"
  rect 1.5x0.6 smd: 1(-0.95,0.95) 2(-0.95,-0.95) 3(0.95,0)
  silkscreen extent -1.07,-1.5 0.7,1.92, body extent -0.7,-1.5 0.7,1.5, height 1.1
SOT740-2 [mm] "BGA, 256-Leads, Body 17x17mm, Pitch 1mm"
  round 0.45 smd: A1(-7.5,7.5) A2(-6.5,7.5) A3(-5.5,7.5) A4(-4.5,7.5) A5(-3.5,7.5) A6(-2.5,7.5) A7(-1.5,7.5) A8(-0.5,7.5) A9(0.5,7.5) A10(1.5,7.5) A11(2.5,7.5) A12(3.5,7.5) A13(4.5,7.5) A14(5.5,7.5) A15(6.5,7.5) A16(7.5,7.5) B1(-7.5,6.5) B2(-6.5,6.5) B3(-5.5,6.5) B4(-4.5,6.5) B5(-3.5,6.5) B6(-2.5,6.5) B7(-1.5,6.5) B8(-0.5,6.5) B9(0.5,6.5) B10(1.5,6.5) B11(2.5,6.5) B12(3.5,6.5) B13(4.5,6.5) B14(5.5,6.5) B15(6.5,6.5) B16(7.5,6.5) C1(-7.5,5.5) C2(-6.5,5.5) C3(-5.5,5.5) C4(-4.5,5.5) C5(-3.5,5.5) C6(-2.5,5.5) C7(-1.5,5.5) C8(-0.5,5.5) C9(0.5,5.5) C10(1.5,5.5) C11(2.5,5.5) C12(3.5,5.5) C13(4.5,5.5) C14(5.5,5.5) C15(6.5,5.5) C16(7.5,5.5) D1(-7.5,4.5) D2(-6.5,4.5) D3(-5.5,4.5) D4(-4.5,4.5) D5(-3.5,4.5) D6(-2.5,4.5) D7(-1.5,4.5) D8(-0.5,4.5) D9(0.5,4.5) D10(1.5,4.5) D11(2.5,4.5) D12(3.5,4.5) D13(4.5,4.5) D14(5.5,4.5) D15(6.5,4.5) D16(7.5,4.5) E1(-7.5,3.5) E2(-6.5,3.5) E3(-5.5,3.5) E4(-4.5,3.5) E5(-3.5,3.5) E6(-2.5,3.5) E7(-1.5,3.5) E8(-0.5,3.5) E9(0.5,3.5) E10(1.5,3.5) E11(2.5,3.5) E12(3.5,3.5) E13(4.5,3.5) E14(5.5,3.5) E15(6.5,3.5) E16(7.5,3.5) F1(-7.5,2.5) F2(-6.5,2.5) F3(-5.5,2.5) F4(-4.5,2.5) F5(-3.5,2.5) F6(-2.5,2.5) F7(-1.5,2.5) F8(-0.5,2.5) F9(0.5,2.5) F10(1.5,2.5) F11(2.5,2.5) F12(3.5,2.5) F13(4.5,2.5) F14(5.5,2.5) F15(6.5,2.5) F16(7.5,2.5) G1(-7.5,1.5) G2(-6.5,1.5) G3(-5.5,1.5) G4(-4.5,1.5) G5(-3.5,1.5) G6(-2.5,1.5) G7(-1.5,1.5) G8(-0.5,1.5) G9(0.5,1.5) G10(1.5,1.5) G11(2.5,1.5) G12(3.5,1.5) G13(4.5,1.5) G14(5.5,1.5) G15(6.5,1.5) G16(7.5,1.5) H1(-7.5,0.5) H2(-6.5,0.5) H3(-5.5,0.5) H4(-4.5,0.5) H5(-3.5,0.5) H6(-2.5,0.5) H7(-1.5,0.5) H8(-0.5,0.5) H9(0.5,0.5) H10(1.5,0.5) H11(2.5,0.5) H12(3.5,0.5) H13(4.5,0.5) H14(5.5,0.5) H15(6.5,0.5) H16(7.5,0.5) J1(-7.5,-0.5) J2(-6.5,-0.5) J3(-5.5,-0.5) J4(-4.5,-0.5) J5(-3.5,-0.5) J6(-2.5,-0.5) J7(-1.5,-0.5) J8(-0.5,-0.5) J9(0.5,-0.5) J10(1.5,-0.5) J11(2.5,-0.5) J12(3.5,-0.5) J13(4.5,-0.5) J14(5.5,-0.5) J15(6.5,-0.5) J16(7.5,-0.5) K1(-7.5,-1.5) K2(-6.5,-1.5) K3(-5.5,-1.5) K4(-4.5,-1.5) K5(-3.5,-1.5) K6(-2.5,-1.5) K7(-1.5,-1.5) K8(-0.5,-1.5) K9(0.5,-1.5) K10(1.5,-1.5) K11(2.5,-1.5) K12(3.5,-1.5) K13(4.5,-1.5) K14(5.5,-1.5) K15(6.5,-1.5) K16(7.5,-1.5) L1(-7.5,-2.5) L2(-6.5,-2.5) L3(-5.5,-2.5) L4(-4.5,-2.5) L5(-3.5,-2.5) L6(-2.5,-2.5) L7(-1.5,-2.5) L8(-0.5,-2.5) L9(0.5,-2.5) L10(1.5,-2.5) L11(2.5,-2.5) L12(3.5,-2.5) L13(4.5,-2.5) L14(5.5,-2.5) L15(6.5,-2.5) L16(7.5,-2.5) M1(-7.5,-3.5) M2(-6.5,-3.5) M3(-5.5,-3.5) M4(-4.5,-3.5) M5(-3.5,-3.5) M6(-2.5,-3.5) M7(-1.5,-3.5) M8(-0.5,-3.5) M9(0.5,-3.5) M10(1.5,-3.5) M11(2.5,-3.5) M12(3.5,-3.5) M13(4.5,-3.5) M14(5.5,-3.5) M15(6.5,-3.5) M16(7.5,-3.5) N1(-7.5,-4.5) N2(-6.5,-4.5) N3(-5.5,-4.5) N4(-4.5,-4.5) N5(-3.5,-4.5) N6(-2.5,-4.5) N7(-1.5,-4.5) N8(-0.5,-4.5) N9(0.5,-4.5) N10(1.5,-4.5) N11(2.5,-4.5) N12(3.5,-4.5) N13(4.5,-4.5) N14(5.5,-4.5) N15(6.5,-4.5) N16(7.5,-4.5) P1(-7.5,-5.5) P2(-6.5,-5.5) P3(-5.5,-5.5) P4(-4.5,-5.5) P5(-3.5,-5.5) P6(-2.5,-5.5) P7(-1.5,-5.5) P8(-0.5,-5.5) P9(0.5,-5.5) P10(1.5,-5.5) P11(2.5,-5.5) P12(3.5,-5.5) P13(4.5,-5.5) P14(5.5,-5.5) P15(6.5,-5.5) P16(7.5,-5.5) R1(-7.5,-6.5) R2(-6.5,-6.5) R3(-5.5,-6.5) R4(-4.5,-6.5) R5(-3.5,-6.5) R6(-2.5,-6.5) R7(-1.5,-6.5) R8(-0.5,-6.5) R9(0.5,-6.5) R10(1.5,-6.5) R11(2.5,-6.5) R12(3.5,-6.5) R13(4.5,-6.5) R14(5.5,-6.5) R15(6.5,-6.5) R16(7.5,-6.5) T1(-7.5,-7.5) T2(-6.5,-7.5) T3(-5.5,-7.5) T4(-4.5,-7.5) T5(-3.5,-7.5) T6(-2.5,-7.5) T7(-1.5,-7.5) T8(-0.5,-7.5) T9(0.5,-7.5) T10(1.5,-7.5) T11(2.5,-7.5) T12(3.5,-7.5) T13(4.5,-7.5) T14(5.5,-7.5) T15(6.5,-7.5) T16(7.5,-7.5)
  silkscreen extent -9.27,-8.5 8.5,8.5, body extent -8.5,-8.5 8.5,8.5, height 1.55
TI-DRB8-1750X1500TP_V [mm] "SON, 8-Leads, Body 3x3mm, Pitch 0.65mm, Thermal Pad 1.50 x 3.8mm"
  rect 0.85x0.35 smd: 1(-1.475,0.975) 2(-1.475,0.325) 3(-1.475,-0.325) 4(-1.475,-0.975) 5(1.475,-0.975) 6(1.475,-0.325) 7(1.475,0.325) 8(1.475,0.975)
  rect 1.5x1.75 smd: 9(0,0)
  Top Layer region: 0.185,0.875 0.185,1.9 0.465,1.9 0.483,1.397 0.465,0.875
  Top Layer region: -0.185,0.875 -0.185,1.9 -0.457,1.905 -0.465,0.875
  Top Layer region: 0.185,-0.875 0.185,-1.9 0.465,-1.9 0.483,-1.397 0.465,-0.875
  Top Layer region: -0.185,-0.875 -0.185,-1.9 -0.465,-1.9 -0.483,-1.397 -0.465,-0.875
  silkscreen extent -2.02,-1.58 1.57,1.62, body extent -1.5,-1.5 1.5,1.5, height 1
TI-DRG8-2000X1200TP_V [mm] "SON, 8-Leads, Body 3x3mm, Pitch 0.5mm, Thermal Pad 1.2x2mm"
  rect 0.95x0.28 smd: 1(-1.425,0.75) 2(-1.425,0.25) 3(-1.425,-0.25) 4(-1.425,-0.75) 5(1.425,-0.75) 6(1.425,-0.25) 7(1.425,0.25) 8(1.425,0.75)
  rect 1.2x2 smd: 9(0,0)
  silkscreen extent -2,-1.55 1.55,1.6, body extent -1.5,-1.5 1.5,1.5, height 0.8
TL3301 [mm]
  rect 1.4x2.1 smd: 1(-2.3,4.5) 1(-2.3,-4.5) 2(2.3,4.5) 2(2.3,-4.5)
  silkscreen extent -2.2,-2.4 2.2,2.4
VLS252012T-2R2M1R3 [mm] "Precision Wire Wound Inductor, 2-Leads, Body 2.5x2.0mm, IPC Medium Density"
  rect 1.65x2.1 smd: 1(-1.025,0) 2(1.025,0)
  body extent -1.3,-1.05 1.3,1.05, height 1.2
WM8778 [mm] "SOP, 28 Pin Wolfson Audio WM8778 Audio Codec"
  oval 2.1x0.45 smd: 1(-3.45,4.225) 2(-3.45,3.575) 3(-3.45,2.925) 4(-3.45,2.275) 5(-3.45,1.625) 6(-3.45,0.975) 7(-3.45,0.325) 8(-3.45,-0.325) 9(-3.45,-0.975) 10(-3.45,-1.625) 11(-3.45,-2.275) 12(-3.45,-2.925) 13(-3.45,-3.575) 14(-3.45,-4.225) 15(3.45,-4.225) 16(3.45,-3.575) 17(3.45,-2.925) 18(3.45,-2.275) 19(3.45,-1.625) 20(3.45,-0.975) 21(3.45,-0.325) 22(3.45,0.325) 23(3.45,0.975) 24(3.45,1.625) 25(3.45,2.275) 26(3.45,2.925) 27(3.45,3.575) 28(3.45,4.225)
  silkscreen extent -3.57,-5.25 2,5.25, body extent -2.8,-5.25 2.8,5.25, height 2

## Part data
1: library part PWR2.5, "Power jack"
"Aux GPIO 0" "Aux GPIO 1": "Header, 5-Pin, Dual row"
C1 C2 C3 C4 C5 C6 C7 C8 C9 C10 C11 C12 C13 C14 C15 C16 C17 C18 C19 C20 C21 C22 C23 C24 C25 C26 C27 C28 C29 C30 C31 C32 C33 C34 C35 C36 C53 C59 C60 C65 C68 C69 C72 C73 C74 C76: "Capacitor (Semiconductor SIM Model)"
C37 C38 C39 C40 C41 C42 C43 C44 C45 C46 C47 C48 C49 C50 C54 C55 C56 C57 C58 C61 C62 C63 C66 C67 C70 C71 C75 C77 C78 C79 C80 C81 C82 C83 C84 C85 C86 C87 C88 C89 C90 C91 C92 C93 C94 C95 C96 C97: library part "Cap Semi", "Capacitor (Semiconductor SIM Model)"
C51 C52: "Polarized Capacitor (Radial)"
C64: library part "Cap Pol1", "Polarized Capacitor (Radial)"
D1 D2: library part Diode, "Default Diode"
DBGEN1 TRST1: "Header, 2-Pin"
FB8 FB9 FB11 FB14 FB15 FB16: library part Inductor, "Inductor"
J3: library part "Micro USB", "Micro USB Jack B"
Q1: "P-Channel MOSFET"
R1 R2 R3 R4 R5 R6 R7 R8 R9 R10 R11 R12 R13 R14 R15 R16 R17 R18 R19 R20 R21 R23 R24 R25 R26 R27 R28 R29 R30 R32 R33 R34 R35 R36 R37 R38 R39: "Resistor"
R22 R31 R40 R41 R42 R43 R44 R45 R46 R47 R48 R49 R50 R51 R52 R53 R54 R55 R56 R57 R58 R59 R60 R61 R62: library part Res3, "Resistor"
RA1 RA2 RA3 RA4 RA5 RA6 RA7: "Resistor array"
SD: library part "JAE SJ107021 microSD Card Socket"
SSP1: "Header, 3-Pin, Dual row"
STATUS "USER STATUS": library part "RGB LED APTF1616SEEZGQBDC", "RGB LED"
U5: "32-bit ARM Cortex-M4 MCU, 264 kB SRAM, 2 HS USB with on-chip PHY, Ethernet, CAN, AES, SPIFI, SGPIO, SCT, 256-Pin LBGA"
U7: "Single Output Automotive LDO, 1 A, Fixed 3.3 V Output, 2.2 to 5.5 V Input, with Reverse Current Protection, 8-pin SON (DRB), -40 to 125 degC, Green (RoHS & no Sb/Br)"
U8: library part LM358_Symbol
U10: "SPIFI Quad Flash"
U11: "Precision, 20 MHz, 0.9 pA Ib, RRIO, CMOS Operational Amplifier, 1.8 to 5.5 V, -40 to 125 degC, 8-pin SON (DRG8), Green (RoHS & no Sb/Br)"
X2: "ABS07-32.768KHZ-T RTC Crystal Oscillator"

## Free pads (board coordinates)
  round 125.1 hole 125.1: ""(850,2000) ""(1242,100) ""(2340,2000) ""(4340,300)

## Via types
v1: diameter 20, hole 13, Top Layer to Bottom Layer, 165 vias
v2: diameter 30, hole 13, Top Layer to Bottom Layer, 70 vias
v3: diameter 25, hole 13, Top Layer to Bottom Layer, 48 vias
v4: diameter 50, hole 25, Top Layer to Bottom Layer, 20 vias
v5: diameter 19.68, hole 11.81, Top Layer to Bottom Layer, 5 vias
v6: diameter 25, hole 15, Top Layer to Bottom Layer, 4 vias
v7: diameter 19.68, hole 7.87, Top Layer to Bottom Layer, 2 vias

## Nets (pads, with @x,y where several pads share a name; then routed paths per layer and width w, separated by ;. In a path a pad name is that pad's centre, name@x,y a point inside that pad or via, vN(x,y) a via of type N, cw(c..) or ccw(c..) an arc to the next point about the centre after c; other vN are vias at no path point)
5VCC: "Power & Reset1.5" C50.2 C53.1 C56.1 C59.2 C65.1 C66.2 C67.2 L1.2 Q1.2 R9.2 R10.1 U7.5 U7.8 U8.8 U9.2 U9.3 | length 1735.9
  Top Layer w10: R9.2@429.77,526 434.3,521.47 v3(500.25,521.47) R10.1@550.25,521.47
  Top Layer w25: v4(185,1038) 119,972 119,950.45 C66.2@131,938.45 177.45,938.45 207.15,968.15 C53.1@275,968.15 ; Q1.2@205.4,1439.6 205.4,1448.4 225,1468 310,1468 330.56,1447.44 330.56,1395.56 307.45,1372.45 U8.8@307.45,1362.59 ; C65.1@333.56,1422 v4(383,1422) ; v4(686,485) 725,446 1094,446 1119.85,471.85 C67.2@1119.85,525 ; v4(690,571) 722.15,538.85 ; 731.15,538.85 C59.2@777,538.85
  Bottom Layer w10: v3(485.25,941) 500.25,926 v3(500.25,521.47)
A0: RA1.8 U12.H7 | length 30.1
  Top Layer w5: U12.H7@1788.01,525.49 1795.88,525.49 v1(1811.63,541.24)
A1: RA1.6 U12.H8 | length 93.1
  Top Layer w5: 1669.9,541.24 1740.76,541.24 U12.H8@1756.51,525.49
A2: RA1.5 U12.J8 | length 55.1
  Top Layer w5: U12.J8@1756.51,556.98 1756.51,612.1
A3: RA1.7 U12.J7 | length 55.1
  Top Layer w5: U12.J7@1788.01,556.98 1788.01,612.1
A4: RA3.8 U12.J3 | length 47.2
  Top Layer w5: U12.J3@1913.99,556.98 1913.99,604.23
A5: RA3.6 U12.J2 | length 47.2
  Top Layer w5: U12.J2@1945.49,556.98 1945.49,604.23
A6: RA3.5 U12.H3 | length 30.1
  Top Layer w5: v1(1890.37,541.24) 1906.12,525.49 U12.H3@1913.99,525.49
A7: RA3.7 U12.H2 | length 93.1
  Top Layer w5: U12.H2@1945.49,525.49 1961.24,541.24 2032.1,541.24
A8: RA5.8 U12.H1 | length 55.1
  Top Layer w5: U12.H1@1976.98,525.49 2024.23,525.49 2016.35,525.49
A9: RA5.6 U12.G3 | length 30.1
  Top Layer w5: v1(1890.37,509.74) 1906.12,493.99 U12.G3@1913.99,493.99
A10: RA5.5 U12.H9 | length 47.2
  Top Layer w5: 1677.77,525.49 U12.H9@1725.02,525.49
A11: RA5.7 U12.G2 | length 85.3
  Top Layer w5: U12.G2@1945.49,493.99 1961.24,509.74 2024.23,509.74
ADC_RX_MCLK: U4.9 U5.M11 | length 27.8
  Top Layer w8: v1(2356.8,931.89) U5.M11@2376.48,951.57
ADC_RX_SCK: U4.8 U5.F13 | length 27.8
  Top Layer w8: U5.F13@2612.7,872.83 v1(2632.39,853.15)
ADC_RX_SDA: U4.10 U5.F11 | length 27.8
  Top Layer w8: U5.F11@2612.7,951.57 v1(2632.39,931.89)
ADC_RX_WS: U4.11 U5.G11 | length 27.8
  Top Layer w8: U5.G11@2573.33,951.57 v1(2593.02,931.89)
AVDD: "Digital IO Higher Byte1.3" C1.2 C2.2 C3.2 C4.2 C5.2 C6.2 C10.2 C11.2 C57.1 C58.1 C79.2 FB5.1 R3.2 U1.3 U1.6 U2.3 U2.6 U3.3 U3.6 U4.26 U7.1 U11.8 | length 2198.1
  Top Layer w10: v2(3675,245) 3705,275 3710,275 3719.41,284.41 U1.3@3748.58,284.41 ; U1.6@3821.42,335.59 3829.69,343.86 C1.2@3829.69,385 v2(3865,385) ; v2(3875,245) 3900,270 C4.2@3900,275.31 3925.31,275.31 3934.41,284.41 U2.3@3948.58,284.41 ; U2.6@4021.42,335.59 4021.42,346.42 4029.69,354.69 C3.2@4029.69,385 v2(4060,385) ; v2(4075,245) 4100,270 C6.2@4100,275.31 4125.31,275.31 4134.41,284.41 U3.3@4148.58,284.41 ; U3.6@4221.42,335.59 4221.42,356.42 4229.69,364.69 C5.2@4229.69,385 ; C5.2@4230,385.31 v2(4230,419)
  Top Layer w15: C58.1@1330.55,928 1365,893.55 ; 2680,2000 2722.03,2042.03 3422.97,2042.03 3478,1987 3478,1828 v2(3497,1809) ; FB5.1@3167.32,1263 v2(3206.7,1263) ; U4.26@3725.83,1160.16 3769.16,1160.16 3819,1210 C10.2@3835,1210 C11.2@3885,1210 3926,1210 v2(3927,1211) ; v2(3934,959) 3934,997.03 R3.2@3935,998.03
  Top Layer w25: C58.1@1322,936.55 v4(1322,991) ; 1365,893.55 1365,746 1383,728 C57.1@1383,665
AVDD-: U11.4
BA0: U5.P15 U12.G7 | length 126.9
  Top Layer w5: U12.G7@1788.01,493.99 1795.88,493.99 v1(1811.63,509.74)
  Top Layer w6: 2278.06,705.51 2278.06,774.41 U5.P15@2297.74,794.09
BA1: U5.N11 U12.G8 | length 150.1
  Top Layer w5: 1640.74,509.74 1740.76,509.74 U12.G8@1756.51,493.99
  Top Layer w6: v1(2317.43,931.89) U5.N11@2337.11,951.57
BST: C26.2 U6.10 | length 110.4
  Top Layer w10: U6.10@400.25,641 416.86,641 434.57,623.28 C26.2@503.32,623.28
CAS#: U5.R16 U12.F7 | length 96.9
  Top Layer w5: U12.F7@1788.01,462.5 1795.88,462.5 v1(1811.63,478.24)
  Top Layer w6: 2258.28,688 2258.37,688.09 U5.R16@2258.37,754.72
CKE: U5.H12 U12.F3 | length 58
  Top Layer w5: v1(1890.37,478.24) 1906.12,462.5 U12.F3@1913.99,462.5
  Top Layer w6: U5.H12@2533.96,912.2 v1(2553.65,892.52)
CLK: U5.T10 U12.F2 | length 85.3
  Top Layer w5: U12.F2@1945.49,462.5 1961.24,478.24 2024.23,478.24
CS#: U5.R5 U12.G9 | length 150.7
  Top Layer w5: 1677.77,493.99 U12.G9@1725.02,493.99
  Top Layer w6: 2168.8,1207.48 2248.53,1207.48 2258.37,1197.64 U5.R5@2258.37,1187.8
DAC_TX_MLCK: U4.5 U5.D14 | length 27.8
  Top Layer w8: U5.D14@2691.44,833.46 v1(2711.13,813.78)
DAC_TX_SCK: U4.4 U5.H4 | length 27.8
  Top Layer w8: U5.H4@2533.96,1227.17 v1(2553.65,1246.85)
DAC_TX_SDA: U4.6 U5.N8 | length 27.8
  Top Layer w8: v1(2317.43,1089.37) U5.N8@2337.11,1069.68
DAC_TX_WS: U4.7 U5.C14 | length 27.8
  Top Layer w8: U5.C14@2730.81,833.46 v1(2750.5,813.78)
DIGI_0: "Digital IO Lower Byte1.8"
DIGI_1: "Digital IO Lower Byte1.7"
DIGI_2: "Digital IO Lower Byte1.6"
DIGI_4: "Digital IO Lower Byte1.4"
DIGI_7: "Digital IO Lower Byte1.1"
DIGI_8: "Digital IO Higher Byte1.10"
DQ0: RA2.1 U12.A8 | length 47.2
  Top Layer w5: 1756.51,257.77 U12.A8@1756.51,305.02
DQ1: RA2.2 U12.B9 | length 47.2
  Top Layer w5: 1677.77,336.51 U12.B9@1725.02,336.51
DQ2: RA2.3 U12.B8 | length 45.3
  Top Layer w5: 1718,353 1718.57,352.44 1740.59,352.44 U12.B8@1756.51,336.51
DQ3: RA2.4 U12.C9 | length 67
  Top Layer w5: 1657.99,368.01 U12.C9@1725.02,368.01
DQ4: RA4.1 U12.C8 | length 103.8
  Top Layer w5: 1659.24,383.76 1740.76,383.76 U12.C8@1756.51,368.01
DQ5: RA4.2 U12.D9 | length 47.2
  Top Layer w5: 1677.77,399.5 U12.D9@1725.02,399.5
DQ6: RA4.3 U12.D8 | length 85.3
  Top Layer w5: 1677.77,415.25 1740.76,415.25 U12.D8@1756.51,399.5
DQ7: RA4.4 U12.E9 | length 55.1
  Top Layer w5: 1669.9,431 U12.E9@1725.02,431
DQ8: RA6.1 U12.E1 | length 58.8
  Top Layer w5: U12.E1@1976.98,431 2033,431 2035,429
DQ9: RA6.2 U12.D2 | length 85.3
  Top Layer w5: U12.D2@1945.49,399.5 1961.24,415.25 2024.23,415.25
DQ10: RA6.3 U12.D1 | length 39.4
  Top Layer w5: U12.D1@1976.98,399.5 2016.35,399.5
DQ11: RA6.4 U12.C2 | length 93.1
  Top Layer w5: U12.C2@1945.49,368.01 1961.24,383.76 2032.1,383.76
DQ12: RA7.1 U12.C1 | length 47.2
  Top Layer w5: U12.C1@1976.98,368.01 2024.23,368.01
DQ13: RA7.2 U12.B2 | length 93.1
  Top Layer w5: U12.B2@1945.49,336.51 1961.24,352.26 2032.1,352.26
DQ14: RA7.3 U12.B1
DQ15: RA7.4 U12.A2 | length 47.2
  Top Layer w5: 1945.49,257.77 U12.A2@1945.49,305.02
DVDD: "Power & Reset1.2" "Power & Reset1.4" C8.2 C9.2 C27.2 C28.2 C32.1 C37.2 C38.2 C39.2 C40.2 C41.2 C42.2 C43.2 C44.2 C45.2 C46.2 C47.2 C48.2 C49.2 C60.2 C61.1 C62.2 C63.2 C64.1 C71.2 C80.2 C81.2 C82.2 C83.2 C84.2 C85.2 C86.2 C87.2 C88.2 C89.2 C90.2 C91.2 C92.2 C93.2 C94.2 C95.2 C96.2 DBGEN1.1 FB1.1 FB2.1 JTAG/DEBUG1.1@2114,1975 L3.2 R1.2 R2.2 R6.1 R7.1 R12.2 R17.2 R18.2 R21.2 R22.2 R40.2 R41.2 R42.2 R58.2 R59.2 R60.2 R61.2 R62.2 SD.4 SSP1.2 TRST1.1 U4.13 U5.B10 U5.D7 U5.E12 U5.F7 U5.F8 U5.F9 U5.F10 U5.G10 U5.H10 U5.J6 U5.J7 U5.K7 U5.L7 U5.L8 U5.L9 U5.L10 U5.N7 U5.N13 U8.2 U9.6 U10.B4 U12.A7 U12.A9 U12.B3 U12.C7 U12.D3 U12.E7 U12.J9 | length 1976
  Top Layer w10: C64.1@666,1407 C64.1@676,1397 ; U9.6@924.4,567.16 936.84,567.16 v2(967,537) ; v3(1666.63,238.25) 1666.94,237.94 C87.2@1696.63,237.94 C88.2@1729.63,237.94 1729.63,281.25 1723.63,287.25 1723.63,303.63 U12.A9@1725.02,305.02 ; v3(1674.63,587.25) C90.2@1674.63,649.57 ; C90.2@1675.32,650.25 C90.2@1674.63,649.57 ; U12.J9@1725.02,556.98 1723.63,558.37 1723.63,633.25 1707.31,649.57 C90.2@1674.63,649.57 ; U12.A7@1788.01,305.02 1795.88,305.02 v1(1811.63,320.76) ; U12.C7@1788.01,368.01 1795.88,368.01 v1(1811.63,383.76) ; U12.E7@1788.01,431 1795.88,431 v1(1811.63,446.75) ; v3(1880.63,181.25) 1880.94,181.57 C91.2@1880.94,212.25 1880.94,303.46 U12.B3@1913.99,336.51 ; v1(1890.37,415.25) 1906.12,399.5 U12.D3@1913.99,399.5 ; v1(2317.43,853.15) U5.N13@2337.11,872.83 ; v1(2317.43,1128.74) U5.N7@2337.11,1109.06 ; v1(2396.17,971.26) U5.L10@2415.85,990.94 ; v1(2396.17,1010.63) U5.L9@2415.85,1030.31 ; v1(2396.17,1089.37) U5.L8@2415.85,1069.68 ; v1(2396.17,1128.74) U5.L7@2415.85,1109.06 ; v1(2435.54,1128.74) U5.K7@2455.22,1109.06 ; v1(2474.91,1128.74) U5.J7@2494.59,1109.06 ; v1(2474.91,1168.11) U5.J6@2494.59,1148.43 ; U5.H10@2533.96,990.94 v1(2553.65,971.26) ; U5.G10@2573.33,990.94 v1(2593.02,971.26) ; U5.F10@2612.7,990.94 v1(2632.39,971.26) ; U5.F9@2612.7,1030.31 v1(2632.39,1010.63) ; U5.F8@2612.7,1069.68 v1(2632.39,1089.37) ; U5.F7@2612.7,1109.06 v1(2632.39,1128.74) ; U5.E12@2652.07,912.2 v1(2671.76,892.52) ; U5.D7@2691.44,1109.06 v1(2711.13,1128.74) ; U5.B10@2770.18,990.94 2789.87,971.26 2839.08,971.26 ; U10.B4@3110.99,744.84 3130.68,725.16 C63.2@3267.13,725.16 ; v2(3267.62,684.65) C63.2@3267.62,725.65
  Top Layer w15: U8.2@139.34,1334.8 174.2,1334.8 275,1234 ; C64.1@637.93,1412 702.58,1347.35 SD.4@848.28,1347.35 ; C64.1@666,1407 v2(666,1456)
  Top Layer w25: v4(995,991) 1005.55,980.45 C61.1@1005.55,928 ; C61.1@998.55,927 C61.1@999.55,928
  other v2: 967,757